# EAGLE board axiom_beta_power_board_v2.23-Min.0bcea971 (EAGLE 7.7.0), part 1 of 5
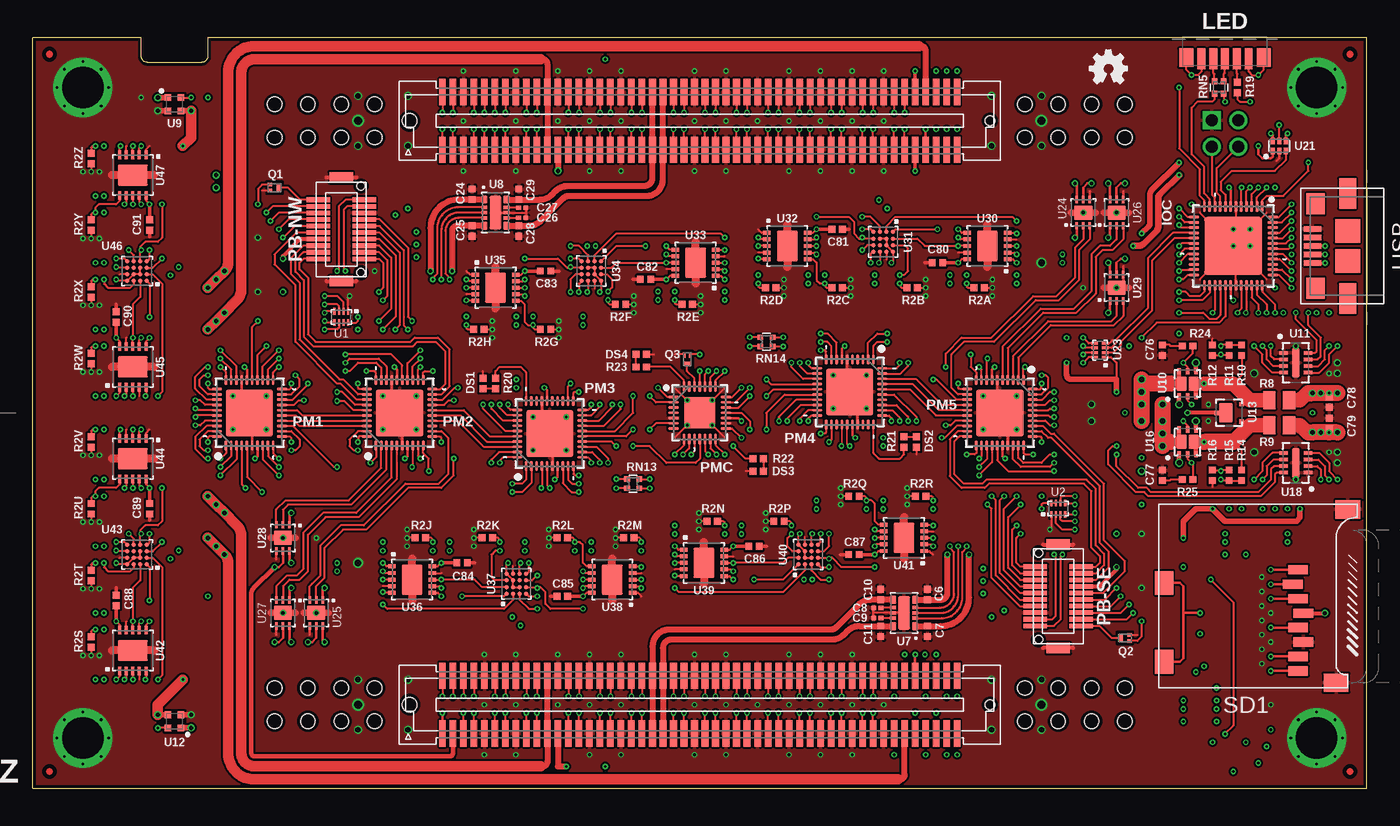
[diagram p0: board, top side]
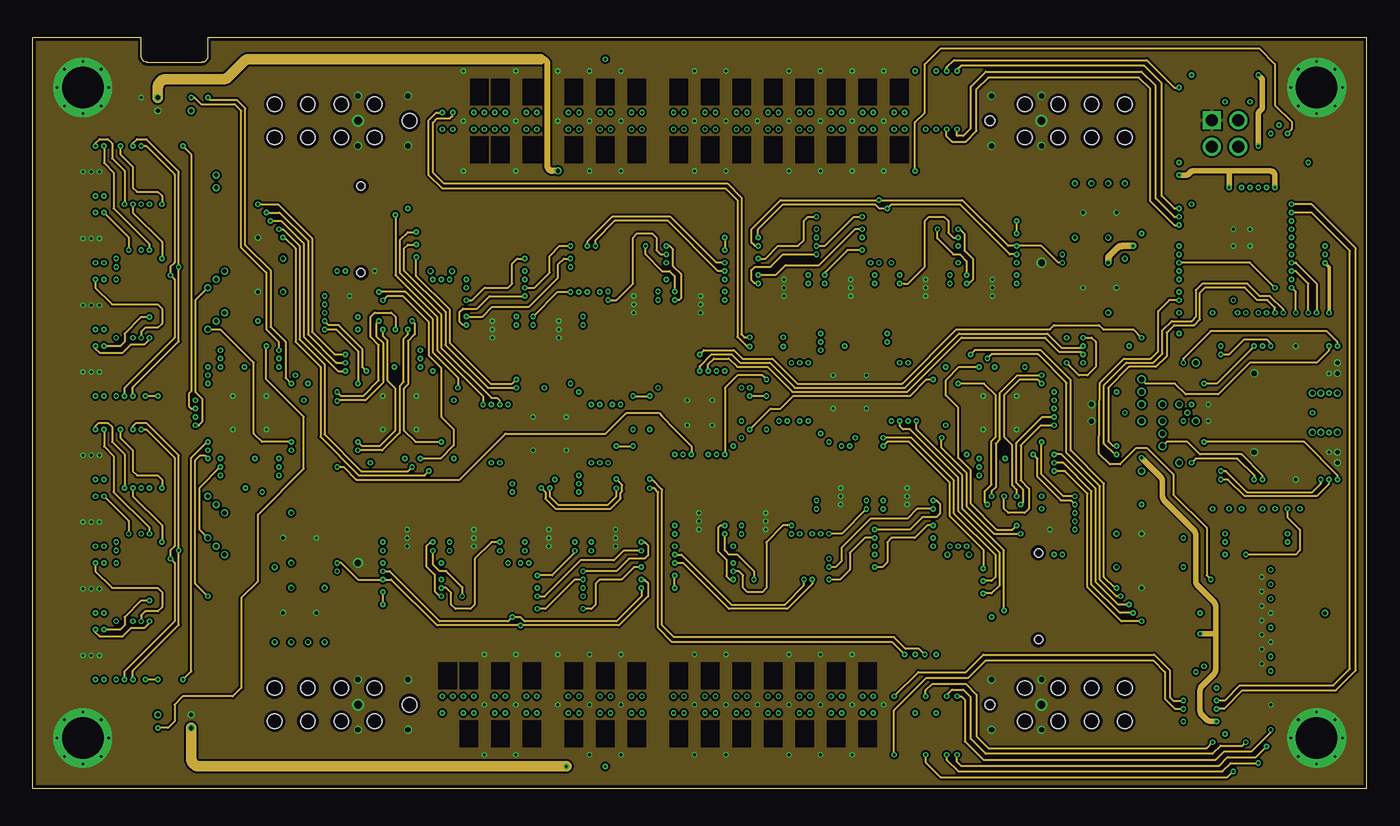
[diagram p1: board, inner layer Route2]
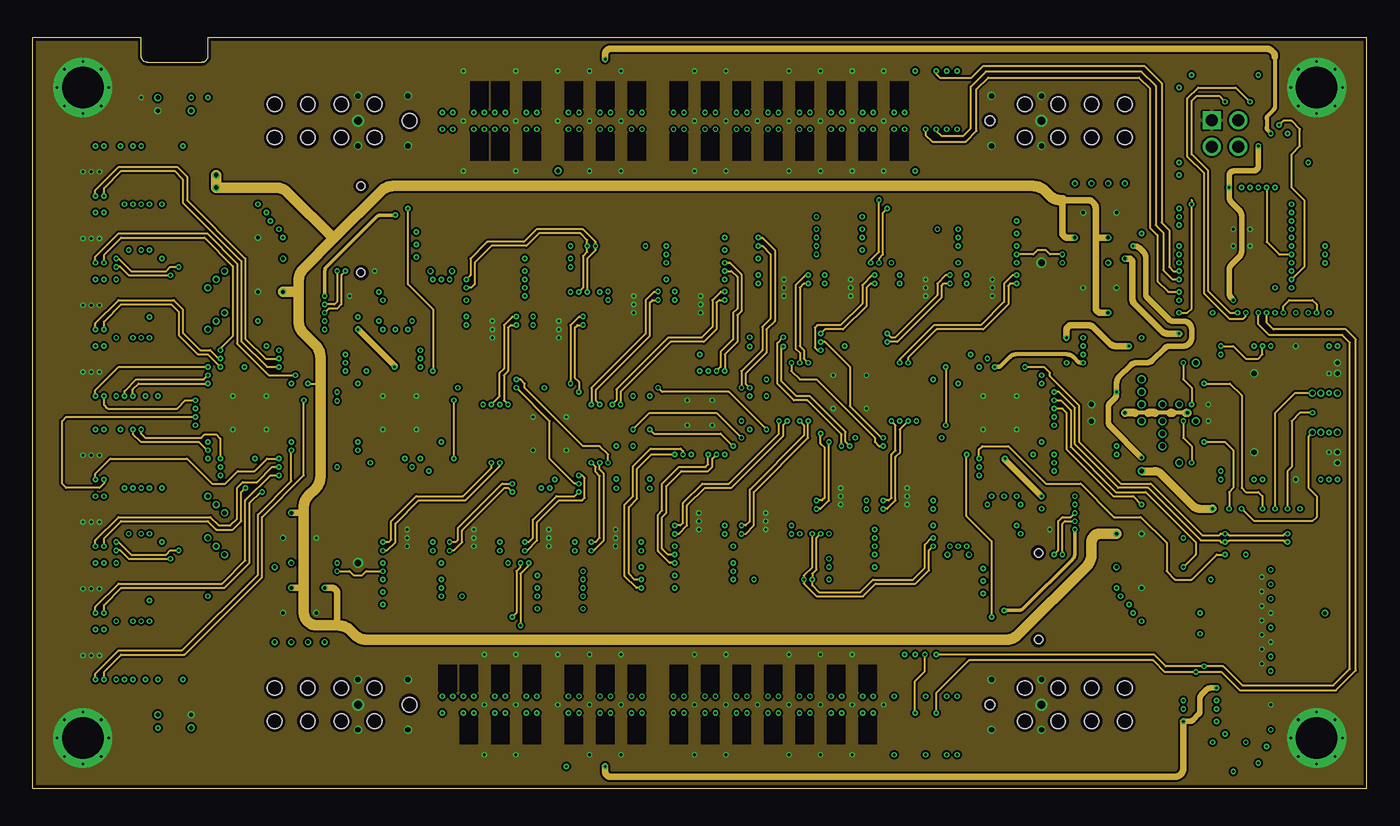
[diagram p2: board, inner layer Route15]
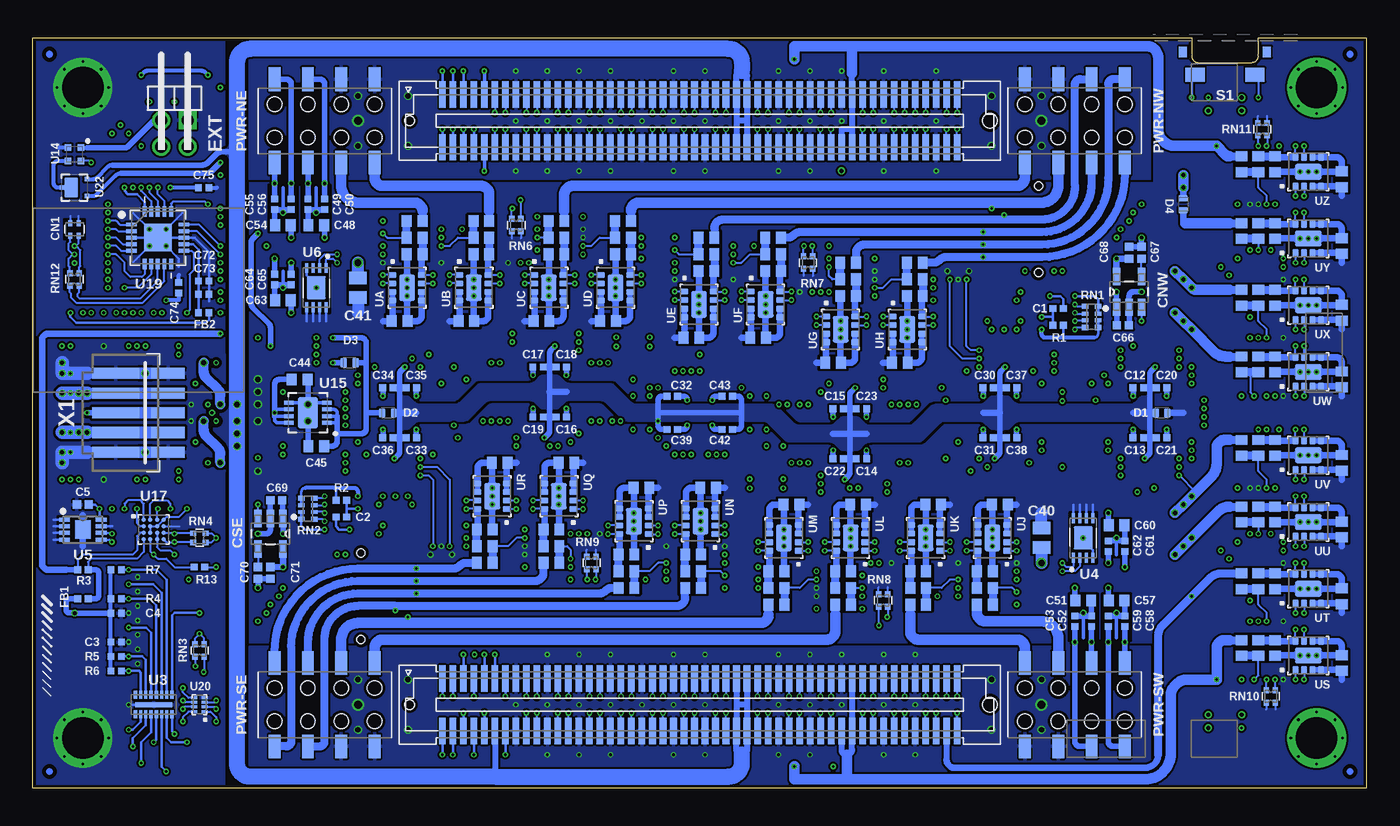
[diagram p3: board, bottom side, seen from below]

Size 101.6 x 57.15 mm. Coordinates in mm from the lower left corner, seen from the top.
Outline: 101.6,57.15 13.33,57.15 13.33,55.75 arc-90 12.83,55.25 8.76,55.25 arc-90 8.25,55.75 8.25,57.15 0,57.15 0,0 101.6,0 101.6,57.15
Copper layers (1*2*15*16): Top 0.035559375mm / dielectric 0.17018125mm / Route2 0.01778125mm / dielectric 47mil / Route15 0.01778125mm / dielectric 0.17018125mm / Bottom 0.035559375mm
Design rules "OSHPark-4layer-tuned *": minimum track width 5mil, minimum drill 8mil, track to track 6mil, track to pad 5mil, pad to pad 5mil, via to via 5mil, smd to smd 0mil, copper to edge 10mil, drill to drill 6mil, minimum pad ring 4mil, minimum via ring 4mil, stop-mask expansion 2mil, vias tented up to drill 25mil, thermal gap 6mil
Net classes: 1 LVDS: width 0.152 mm, drill 0.203 mm, clearance 0.152 mm
tKeepout: area 1.3,50.8 to 6.3,55.9; area 1.3,1.3 to 6.3,6.3; area 95.2,1.3 to 100.3,6.3; area 95.2,50.8 to 100.3,55.9
bKeepout: area 95.2,50.8 to 100.3,55.9; area 95.2,1.3 to 100.3,6.3; area 1.3,1.3 to 6.3,6.3; area 1.3,50.8 to 6.3,55.9

## Footprints (pad centres in the part's own frame; a part is rotated, then mirrored left to right if it is on the bottom)
µZ-SOCKET-NOHOLES-R = smd 0.5 x 2: 1 19.6,24.425; 2 19.6,20.027; 3 18.8,24.425; 4 18.8,20.027; 5 18,24.425; 6 18,20.027; 7 17.2,24.425; 8 17.2,20.027; 9 16.4,24.425; 10 16.4,20.027; 11 15.6,24.425; 12 15.6,20.027; 13 14.8,24.425; 14 14.8,20.027; 15 14,24.425; 16 14,20.027; 17 13.2,24.425; 18 13.2,20.027; 19 12.4,24.425; 20 12.4,20.027; 21 11.6,24.425; 22 11.6,20.027; 23 10.8,24.425; 24 10.8,20.027; 25 10,24.425; 26 10,20.027; 27 9.2,24.425; 28 9.2,20.027; 29 8.4,24.425; 30 8.4,20.027; 31 7.6,24.425; 32 7.6,20.027; 33 6.8,24.425; 34 6.8,20.027; 35 6,24.425; 36 6,20.027; 37 5.2,24.425; 38 5.2,20.027; 39 4.4,24.425; 40 4.4,20.027; 41 3.6,24.425; 42 3.6,20.027; 43 2.8,24.425; 44 2.8,20.027; 45 2,24.425; 46 2,20.027; 47 1.2,24.425; 48 1.2,20.027; 49 0.4,24.425; 50 0.4,20.027; 51 -0.4,24.425; 52 -0.4,20.027; 53 -1.2,24.425; 54 -1.2,20.027; 55 -2,24.425; 56 -2,20.027; 57 -2.8,24.425; 58 -2.8,20.027; 59 -3.6,24.425; 60 -3.6,20.027; 61 -4.4,24.425; 62 -4.4,20.027; 63 -5.2,24.425; 64 -5.2,20.027; 65 -6,24.425; 66 -6,20.027; 67 -6.8,24.425; 68 -6.8,20.027; 69 -7.6,24.425; 70 -7.6,20.027; 71 -8.4,24.425; 72 -8.4,20.027; 73 -9.2,24.425; 74 -9.2,20.027; 75 -10,24.425; 76 -10,20.027; 77 -10.8,24.425; 78 -10.8,20.027; 79 -11.6,24.425; 80 -11.6,20.027; 81 -12.4,24.425; 82 -12.4,20.027; 83 -13.2,24.425; 84 -13.2,20.027; 85 -14,24.425; 86 -14,20.027; 87 -14.8,24.425; 88 -14.8,20.027; 89 -15.6,24.425; 90 -15.6,20.027; 91 -16.4,24.425; 92 -16.4,20.027; 93 -17.2,24.425; 94 -17.2,20.027; 95 -18,24.425; 96 -18,20.027; 97 -18.8,24.425; 98 -18.8,20.027; 99 -19.6,24.425; 100 -19.6,20.027; 101 19.6,-20.025; 102 19.6,-24.425; 103 18.8,-20.027; 104 18.8,-24.425; 105 18,-20.027; 106 18,-24.425; 107 17.2,-20.027; 108 17.2,-24.425; 109 16.4,-20.027; 110 16.4,-24.425; 111 15.6,-20.027; 112 15.6,-24.425; 113 14.8,-20.027; 114 14.8,-24.425; 115 14,-20.027; 116 14,-24.425; 117 13.2,-20.027; 118 13.2,-24.425; 119 12.4,-20.027; 120 12.4,-24.425; 121 11.6,-20.027; 122 11.6,-24.425; 123 10.8,-20.027; 124 10.8,-24.425; 125 10,-20.027; 126 10,-24.425; 127 9.2,-20.027; 128 9.2,-24.425; 129 8.4,-20.027; 130 8.4,-24.425; 131 7.6,-20.027; 132 7.6,-24.425; 133 6.8,-20.027; 134 6.8,-24.425; 135 6,-20.027; 136 6,-24.425; 137 5.2,-20.027; 138 5.2,-24.425; 139 4.4,-20.027; 140 4.4,-24.425; 141 3.6,-20.027; 142 3.6,-24.425; 143 2.8,-20.027; 144 2.8,-24.425; 145 2,-20.027; 146 2,-24.425; 147 1.2,-20.027; 148 1.2,-24.425; 149 0.4,-20.027; 150 0.4,-24.425; 151 -0.4,-20.027; 152 -0.4,-24.425; 153 -1.2,-20.027; 154 -1.2,-24.425; 155 -2,-20.027; 156 -2,-24.425; 157 -2.8,-20.027; 158 -2.8,-24.425; 159 -3.6,-20.027; 160 -3.6,-24.425; 161 -4.4,-20.027; 162 -4.4,-24.425; 163 -5.2,-20.027; 164 -5.2,-24.425; 165 -6,-20.027; 166 -6,-24.425; 167 -6.8,-20.027; 168 -6.8,-24.425; 169 -7.6,-20.027; 170 -7.6,-24.425; 171 -8.4,-20.027; 172 -8.4,-24.425; 173 -9.2,-20.027; 174 -9.2,-24.425; 175 -10,-20.027; 176 -10,-24.425; 177 -10.8,-20.027; 178 -10.8,-24.425; 179 -11.6,-20.027; 180 -11.6,-24.425; 181 -12.4,-20.027; 182 -12.4,-24.425; 183 -13.2,-20.027; 184 -13.2,-24.425; 185 -14,-20.027; 186 -14,-24.425; 187 -14.8,-20.027; 188 -14.8,-24.425; 189 -15.6,-20.027; 190 -15.6,-24.425; 191 -16.4,-20.027; 192 -16.4,-24.425; 193 -17.2,-20.027; 194 -17.2,-24.425; 195 -18,-20.027; 196 -18,-24.425; 197 -18.8,-20.027; 198 -18.8,-24.425; 199 -19.6,-20.027; 200 -19.6,-24.425 | hole 0.725: 22.1,22.225; 22.1,-22.225 | hole 1.125: -22.1,22.225; -22.1,-22.225
0402-C = smd 0.52 x 0.52: 1 -0.4,0; 2 0.4,0
0603-C = smd 0.75 x 0.9: 1 -0.6,0; 2 0.6,0
0402-B = smd 0.62 x 0.62: 1 -0.45,0; 2 0.45,0
0201-C = smd 0.36 x 0.32: 1 -0.28,0; 2 0.28,0
0805-C = smd 0.95 x 1.35: 1 -0.75,0; 2 0.75,0
CC0504 = smd 0.3 x 0.45: 1 -0.32,-0.475; 2 0.32,-0.475; 3 0.32,0.475; 4 -0.32,0.475
SOT95P280X145-5N = smd 1.321 x 0.559: 1 -1.168,0.94; 2 -1.168,0; 3 -1.168,-0.94; 4 1.168,-0.94; 5 1.168,0.94
DFN1006D-2 = smd 0.5 x 0.7: A 0.45,0; C -0.45,0
2X02M/90-S = drill 0.914 square: 1 1,1 | drill 0.914: 2 1,-1; 3 -1,1; 4 -1,-1
UQFN50P600X600X100-49N-NSM = smd 0.8 x 0.2: 1 -3,2.2; 2 -3,1.8; 3 -3,1.4; 4 -3,1; 5 -3,0.6; 6 -3,0.2; 7 -3,-0.2; 8 -3,-0.6; 9 -3,-1; 10 -3,-1.4; 11 -3,-1.8; 12 -3,-2.2; 25 3,-2.2; 26 3,-1.8; 27 3,-1.4; 28 3,-1; 29 3,-0.6; 30 3,-0.2; 31 3,0.2; 32 3,0.6; 33 3,1; 34 3,1.4; 35 3,1.8; 36 3,2.2 | smd 0.2 x 0.8: 13 -2.2,-3; 14 -1.8,-3; 15 -1.4,-3; 16 -1,-3; 17 -0.6,-3; 18 -0.2,-3; 19 0.2,-3; 20 0.6,-3; 21 1,-3; 22 1.4,-3; 23 1.8,-3; 24 2.2,-3; 37 2.2,3; 38 1.8,3; 39 1.4,3; 40 1,3; 41 0.6,3; 42 0.2,3; 43 -0.2,3; 44 -0.6,3; 45 -1,3; 46 -1.4,3; 47 -1.8,3; 48 -2.2,3 | smd 4.4 x 4.4: EP 0,0
MSL0104-SL = smd 1.06 x 1.4: 1 2.95,-0.9; 7 -2.95,-0.9 | smd 0.6 x 1.6: 2 1.8,-1; 3 0.9,-1; 4 0,-1; 5 -0.9,-1; 6 -1.8,-1
DF12(XX)-20DP-0.5V = smd 1.8 x 0.35: 1 -1.75,2.25; 2 1.75,2.25; 3 -1.75,1.75; 4 1.75,1.75; 5 -1.75,1.25; 6 1.75,1.25; 7 -1.75,0.75; 8 1.75,0.75; 9 -1.75,0.25; 10 1.75,0.25; 11 -1.75,-0.25; 12 1.75,-0.25; 13 -1.75,-0.75; 14 1.75,-0.75; 15 -1.75,-1.25; 16 1.75,-1.25; 17 -1.75,-1.75; 18 1.75,-1.75; 19 -1.75,-2.25; 20 1.75,-2.25 | smd 1.8 x 0.8: M1 0,3.95; M2 0,-3.95 | hole 0.625: 1.5,-3.3; 1.5,3.3
UQFN40P500X500X100-41N-NSM = smd 0.75 x 0.2: 1 -2.48,1.8; 2 -2.48,1.4; 3 -2.48,1; 4 -2.48,0.6; 5 -2.48,0.2; 6 -2.48,-0.2; 7 -2.48,-0.6; 8 -2.48,-1; 9 -2.48,-1.4; 10 -2.48,-1.8; 21 2.48,-1.8; 22 2.48,-1.4; 23 2.48,-1; 24 2.48,-0.6; 25 2.48,-0.2; 26 2.48,0.2; 27 2.48,0.6; 28 2.48,1; 29 2.48,1.4; 30 2.48,1.8 | smd 0.2 x 0.75: 11 -1.8,-2.48; 12 -1.4,-2.48; 13 -1,-2.48; 14 -0.6,-2.48; 15 -0.2,-2.48; 16 0.2,-2.48; 17 0.6,-2.48; 18 1,-2.48; 19 1.4,-2.48; 20 1.8,-2.48; 31 1.8,2.48; 32 1.4,2.48; 33 1,2.48; 34 0.6,2.48; 35 0.2,2.48; 36 -0.2,2.48; 37 -0.6,2.48; 38 -1,2.48; 39 -1.4,2.48; 40 -1.8,2.48 | smd 3.6 x 3.6: EP 0,0
UQFN50P400X400X100-29N-NSM = smd 0.8 x 0.2: 1 -2,1.2; 2 -2,0.8; 3 -2,0.4; 4 -2,0; 5 -2,-0.4; 6 -2,-0.8; 7 -2,-1.2; 15 2,-1.2; 16 2,-0.8; 17 2,-0.4; 18 2,0; 19 2,0.4; 20 2,0.8; 21 2,1.2 | smd 0.2 x 0.8: 8 -1.2,-2; 9 -0.8,-2; 10 -0.4,-2; 11 0,-2; 12 0.4,-2; 13 0.8,-2; 14 1.2,-2; 22 1.2,2; 23 0.8,2; 24 0.4,2; 25 0,2; 26 -0.4,2; 27 -0.8,2; 28 -1.2,2 | smd 2.4 x 2.4: EP 0,0
R2X04 = smd 0.9 x 1.8: 1 -3.81,3.175; 2 -3.81,-3.175; 3 -1.27,3.175; 4 -1.27,-3.175; 5 1.27,3.175; 6 1.27,-3.175; 7 3.81,3.175; 8 3.81,-3.175 | hole 1.1: -3.81,1.27; -1.27,1.27; -1.27,-1.27; -3.81,-1.27; 1.27,1.27; 1.27,-1.27; 3.81,1.27; 3.81,-1.27
SOT883(B) = smd 0.4 x 0.25: 1 -0.35,0.225; 2 -0.35,-0.225 | smd 0.4 x 0.7: 3 0.35,0
4X0402ARV341 = smd 0.4 x 0.5: 1 -0.8,-0.5; 4 0.8,-0.5; 5 0.8,0.5; 8 -0.8,0.5 | smd 0.3 x 0.5: 2 -0.25,-0.5; 3 0.25,-0.5; 6 0.25,0.5; 7 -0.25,0.5
EXB24V = smd 0.4 x 0.45: 1 -0.35,-0.475; 2 0.35,-0.475; 3 0.35,0.475; 4 -0.35,0.475
SKSNLAE010 = smd 1.45 x 1.05: 1 -2.275,2.575; 2 2.275,2.575 | smd 0.6 x 0.8: 3 -3.2,0.85; 4 3.2,0.85
TF-MICRO-SD_PP2 = smd 0.7 x 1.5: 1 9,-10.64; 2 7.9,-10.24; 3 6.8,-10.64; 4 5.7,-11.04; 5 4.6,-10.64; 6 3.5,-11.04; 7 2.4,-10.64; 8 1.3,-10.64 | smd 1.8 x 1.4: CD1 2,-0.44; CD2 8,-0.44 | smd 1.4 x 1.9: MT1 0.4,-13.54; MT2 13.6,-14.44
UDFN-8 = smd 0.22 x 0.48: 1 -0.525,-0.43; 2 -0.175,-0.43; 3 0.175,-0.43; 4 0.525,-0.43; 5 0.525,0.43; 6 0.175,0.43; 7 -0.175,0.43; 8 -0.525,0.43
SON40P135X330X55-17N = smd 0.61 x 0.254: 1 -0.737,1.397; 2 -0.737,0.991; 3 -0.737,0.61; 4 -0.737,0.203; 5 -0.737,-0.203; 6 -0.737,-0.61; 7 -0.737,-0.991; 8 -0.737,-1.397; 9 0.737,-1.397; 10 0.737,-0.991; 11 0.737,-0.61; 12 0.737,-0.203; 13 0.737,0.203; 14 0.737,0.61; 15 0.737,0.991; 16 0.737,1.397 | smd 0.406 x 2.794: 17 0,0
DFN-8 = smd 0.3 x 0.75: 1 -0.75,-1.5; 2 -0.25,-1.5; 3 0.25,-1.5; 4 0.75,-1.5; 5 0.75,1.5; 6 0.25,1.5; 7 -0.25,1.5; 8 -0.75,1.5 | smd 1.45 x 1.75: EP 0,0
DFN200X300X100-9N = smd 0.813 x 0.305: 1 -1.397,0.762; 2 -1.397,0.254; 3 -1.397,-0.254; 4 -1.397,-0.762; 5 1.397,-0.762; 6 1.397,-0.254; 7 1.397,0.254; 8 1.397,0.762 | smd 1.194 x 1.397: EP 0,0
V-DFN3020-14 = smd 0.65 x 0.5: 1 -1,-0.85; 5 1,-0.85; 6 1,0.85; 10 -1,0.85 | smd 0.25 x 0.5: 2 -0.4,-0.85; 3 0,-0.85; 4 0.4,-0.85; 7 0.4,0.85; 8 0,0.85; 9 -0.4,0.85 | smd 2.55 x 0.9: EP 0,0
MLF-4 = smd 0.5 x 0.5: 1 -0.5,-0.5; 2 0.5,-0.5; 3 0.5,0.5; 4 -0.5,0.5
UDFN6 = smd 0.47 x 0.35: 1 -0.95,0.65; 2 -0.95,0; 3 -0.95,-0.65; 4 0.95,-0.65; 5 0.95,0; 6 0.95,0.65 | smd 1.1 x 0.75: D1 0,0.46; D2 0,-0.46
DFN8 = smd 0.25 x 0.7: 1 -0.75,-0.925; 2 -0.25,-0.925; 3 0.25,-0.925; 4 0.75,-0.925; 5 0.75,0.925; 6 0.25,0.925; 7 -0.25,0.925; 8 -0.75,0.925 | smd 2.2 x 0.6: EP 0,0
DFN2020D-3 = smd 0.45 x 0.35: 1 -0.95,0.65; 2 -0.95,-0.65; 3 0.95,0 | smd 1 x 1.5: 4 0.25,0
DFN3X3_8LEAD = smd 0.813 x 0.305: 1 -1.448,0.762; 2 -1.448,0.254; 3 -1.448,-0.254; 4 -1.448,-0.762; 5 1.448,-0.762; 6 1.448,-0.254; 7 1.448,0.254; 8 1.448,0.762 | smd 1.549 x 2.388: 9 0,0
WLCSP-16-LP = smd 0.325 x 0.325: A1 -0.75,0.75; A2 -0.25,0.75; A3 0.25,0.75; A4 0.75,0.75; B1 -0.75,0.25; B2 -0.25,0.25; B3 0.25,0.25; B4 0.75,0.25; C1 -0.75,-0.25; C2 -0.25,-0.25; C3 0.25,-0.25; C4 0.75,-0.25; D1 -0.75,-0.75; D2 -0.25,-0.75; D3 0.25,-0.75; D4 0.75,-0.75
QFN65P400X400X100-21N-NSM = smd 0.8 x 0.3: 1 -2,1; 2 -2,0.5; 3 -2,0; 4 -2,-0.5; 5 -2,-1; 11 2,-1; 12 2,-0.5; 13 2,0; 14 2,0.5; 15 2,1 | smd 0.3 x 0.8: 6 -1,-2; 7 -0.5,-2; 8 0,-2; 9 0.5,-2; 10 1,-2; 16 1,2; 17 0.5,2; 18 0,2; 19 -0.5,2; 20 -1,2 | smd 2.1 x 2.1: EP 0,0
X2SON-8 = smd 0.2 x 0.52: 1 -0.525,-0.4; 2 -0.175,-0.4; 3 0.175,-0.4; 4 0.525,-0.4; 5 0.525,0.4; 6 0.175,0.4; 7 -0.175,0.4; 8 -0.525,0.4
MICROPAK-6 = smd 0.3 x 0.5: 1 -0.5,-0.375; 2 0,-0.375; 3 0.5,-0.375; 4 0.5,0.375; 5 0,0.375; 6 -0.5,0.375
DFN2018-6 = smd 0.25 x 0.55: 1 -0.5,-1; 2 0,-1; 3 0.5,-1; 4 0.5,1; 5 0,1; 6 -0.5,1 | smd 1.4 x 1.1: 10 0,0
DFN-10 = smd 0.3 x 0.65: 1 -1,-1.55; 2 -0.5,-1.55; 3 0,-1.55; 4 0.5,-1.55; 5 1,-1.55; 6 1,1.55; 7 0.5,1.55; 8 0,1.55; 9 -0.5,1.55; 10 -1,1.55 | smd 2.3 x 1.6: EP 0,0
MICROSIP = smd 0.48 x 0.58: 1 -0.975,-1.1; 2 -0.325,-1.1; 3 0.325,-1.1; 4 0.975,-1.1; 5 0.975,1.1; 6 0.325,1.1; 7 -0.325,1.1; 8 -0.975,1.1 | smd 2 x 1.2: EP 0,0
MICRO-AB-H-SMT = smd 0.4 x 1.35: 1 -1.3,4.125; 2 -0.65,4.125; 3 0,4.125; 4 0.65,4.125; 5 1.3,4.125 | smd 2.3 x 1.3: Z1 -4,1.45; Z4 4,1.45 | smd 1.8 x 1.9: Z2 -1.15,1.45; Z3 1.15,1.45 | smd 1.6 x 1.4: Z5 -3.2,3.9; Z6 3.2,3.9
PICO-SPOX-5 = smd 0.85 x 2.55: 1 -3,-6.5; 2 -1.5,-6.5; 3 0,-6.5; 4 1.5,-6.5; 5 3,-6.5 | smd 0.85 x 3.55: 1A -3,-2.5; 2A -1.5,-2.5; 3A 0,-2.5; 4A 1.5,-2.5; 5A 3,-2.5
µZ-CONONLY = smd 0.5 x 2: 1 19.6,-24.226; 2 19.6,-20.226; 3 18.8,-24.226; 4 18.8,-20.226; 5 18,-24.226; 6 18,-20.226; 7 17.2,-24.226; 8 17.2,-20.226; 9 16.4,-24.226; 10 16.4,-20.226; 11 15.6,-24.226; 12 15.6,-20.226; 13 14.8,-24.226; 14 14.8,-20.226; 15 14,-24.226; 16 14,-20.226; 17 13.2,-24.226; 18 13.2,-20.226; 19 12.4,-24.226; 20 12.4,-20.226; 21 11.6,-24.226; 22 11.6,-20.226; 23 10.8,-24.226; 24 10.8,-20.226; 25 10,-24.226; 26 10,-20.226; 27 9.2,-24.226; 28 9.2,-20.226; 29 8.4,-24.226; 30 8.4,-20.226; 31 7.6,-24.226; 32 7.6,-20.226; 33 6.8,-24.226; 34 6.8,-20.226; 35 6,-24.226; 36 6,-20.226; 37 5.2,-24.226; 38 5.2,-20.226; 39 4.4,-24.226; 40 4.4,-20.226; 41 3.6,-24.226; 42 3.6,-20.226; 43 2.8,-24.226; 44 2.8,-20.226; 45 2,-24.226; 46 2,-20.226; 47 1.2,-24.226; 48 1.2,-20.226; 49 0.4,-24.226; 50 0.4,-20.226; 51 -0.4,-24.226; 52 -0.4,-20.226; 53 -1.2,-24.226; 54 -1.2,-20.226; 55 -2,-24.226; 56 -2,-20.226; 57 -2.8,-24.226; 58 -2.8,-20.226; 59 -3.6,-24.226; 60 -3.6,-20.226; 61 -4.4,-24.226; 62 -4.4,-20.226; 63 -5.2,-24.226; 64 -5.2,-20.226; 65 -6,-24.226; 66 -6,-20.226; 67 -6.8,-24.226; 68 -6.8,-20.226; 69 -7.6,-24.226; 70 -7.6,-20.226; 71 -8.4,-24.226; 72 -8.4,-20.226; 73 -9.2,-24.226; 74 -9.2,-20.226; 75 -10,-24.226; 76 -10,-20.226; 77 -10.8,-24.226; 78 -10.8,-20.226; 79 -11.6,-24.226; 80 -11.6,-20.226; 81 -12.4,-24.226; 82 -12.4,-20.226; 83 -13.2,-24.226; 84 -13.2,-20.226; 85 -14,-24.226; 86 -14,-20.226; 87 -14.8,-24.226; 88 -14.8,-20.226; 89 -15.6,-24.226; 90 -15.6,-20.226; 91 -16.4,-24.226; 92 -16.4,-20.226; 93 -17.2,-24.226; 94 -17.2,-20.226; 95 -18,-24.226; 96 -18,-20.226; 97 -18.8,-24.226; 98 -18.8,-20.226; 99 -19.6,-24.226; 100 -19.6,-20.226; 101 19.6,20.226; 102 19.6,24.226; 103 18.8,20.226; 104 18.8,24.226; 105 18,20.226; 106 18,24.226; 107 17.2,20.226; 108 17.2,24.226; 109 16.4,20.226; 110 16.4,24.226; 111 15.6,20.226; 112 15.6,24.226; 113 14.8,20.226; 114 14.8,24.226; 115 14,20.226; 116 14,24.226; 117 13.2,20.226; 118 13.2,24.226; 119 12.4,20.226; 120 12.4,24.226; 121 11.6,20.226; 122 11.6,24.226; 123 10.8,20.226; 124 10.8,24.226; 125 10,20.226; 126 10,24.226; 127 9.2,20.226; 128 9.2,24.226; 129 8.4,20.226; 130 8.4,24.226; 131 7.6,20.226; 132 7.6,24.226; 133 6.8,20.226; 134 6.8,24.226; 135 6,20.226; 136 6,24.226; 137 5.2,20.226; 138 5.2,24.226; 139 4.4,20.226; 140 4.4,24.226; 141 3.6,20.226; 142 3.6,24.226; 143 2.8,20.226; 144 2.8,24.226; 145 2,20.226; 146 2,24.226; 147 1.2,20.226; 148 1.2,24.226; 149 0.4,20.226; 150 0.4,24.226; 151 -0.4,20.226; 152 -0.4,24.226; 153 -1.2,20.226; 154 -1.2,24.226; 155 -2,20.226; 156 -2,24.226; 157 -2.8,20.226; 158 -2.8,24.226; 159 -3.6,20.226; 160 -3.6,24.226; 161 -4.4,20.226; 162 -4.4,24.226; 163 -5.2,20.226; 164 -5.2,24.226; 165 -6,20.226; 166 -6,24.226; 167 -6.8,20.226; 168 -6.8,24.226; 169 -7.6,20.226; 170 -7.6,24.226; 171 -8.4,20.226; 172 -8.4,24.226; 173 -9.2,20.226; 174 -9.2,24.226; 175 -10,20.226; 176 -10,24.226; 177 -10.8,20.226; 178 -10.8,24.226; 179 -11.6,20.226; 180 -11.6,24.226; 181 -12.4,20.226; 182 -12.4,24.226; 183 -13.2,20.226; 184 -13.2,24.226; 185 -14,20.226; 186 -14,24.226; 187 -14.8,20.226; 188 -14.8,24.226; 189 -15.6,20.226; 190 -15.6,24.226; 191 -16.4,20.226; 192 -16.4,24.226; 193 -17.2,20.226; 194 -17.2,24.226; 195 -18,20.226; 196 -18,24.226; 197 -18.8,20.226; 198 -18.8,24.226; 199 -19.6,20.226; 200 -19.6,24.226 | hole 1.125: -22.1,-22.225; -22.1,22.225 | hole 0.725: 22.1,-22.225; 22.1,22.225

## Placement (x,y rotation side)
BETA  µZ-FCI-SOCKET-NOHOLES-R  [µZ-SOCKET-NOHOLES-R]  50.8,28.57 0 top
C1  10n  [0402-C]  23.49,36.51 0 bottom
C1A  [0603-C]  73.66,35.56 0 bottom
C1B  [0603-C]  68.58,35.56 0 bottom
C1C  [0603-C]  62.86,35.56 0 bottom
C1D  [0603-C]  57.78,35.56 0 bottom
C1E  [0603-C]  51.43,34.29 0 bottom
C1F  [0603-C]  46.35,34.29 0 bottom
C1G  [0603-C]  40.64,32.38 0 bottom
C1H  [0603-C]  35.56,32.38 0 bottom
C1J  [0603-C]  27.94,21.59 180 bottom
C1K  [0603-C]  33.02,21.59 180 bottom
C1L  [0603-C]  38.73,21.59 180 bottom
C1M  [0603-C]  43.81,21.59 180 bottom
C1N  [0603-C]  50.16,22.86 180 bottom
C1P  [0603-C]  55.24,22.86 180 bottom
C1Q  [0603-C]  60.96,24.77 180 bottom
C1R  [0603-C]  66.04,24.77 180 bottom
C1S  [0603-C]  1.9,9.52 90 bottom
C1T  [0603-C]  1.9,14.6 90 bottom
C1U  [0603-C]  1.9,19.68 90 bottom
C1V  [0603-C]  1.9,24.77 90 bottom
C1W  [0603-C]  1.9,31.11 90 bottom
C1X  [0603-C]  1.9,36.2 90 bottom
C1Y  [0603-C]  1.9,41.27 90 bottom
C1Z  [0603-C]  1.9,46.36 90 bottom
C2  10n  [0402-C]  78.1,20.64 180 bottom
C2A  [0603-C]  72.52,40.64 180 bottom
C2B  [0603-C]  67.44,40.64 180 bottom
C2C  [0603-C]  61.72,40.64 180 bottom
C2D  [0603-C]  56.64,40.64 180 bottom
C2E  [0603-C]  50.29,39.37 180 bottom
C2F  [0603-C]  45.21,39.37 180 bottom
C2G  [0603-C]  39.5,37.47 180 bottom
C2H  [0603-C]  34.42,37.47 180 bottom
C2J  [0603-C]  29.08,16.51 0 bottom
C2K  [0603-C]  34.16,16.51 0 bottom
C2L  [0603-C]  39.88,16.51 0 bottom
C2M  [0603-C]  44.96,16.51 0 bottom
C2N  [0603-C]  51.31,17.78 0 bottom
C2P  [0603-C]  56.39,17.78 0 bottom
C2Q  [0603-C]  62.1,19.68 0 bottom
C2R  [0603-C]  67.18,19.68 0 bottom
C2S  [0603-C]  6.98,10.67 270 bottom
C2T  [0603-C]  6.98,15.75 270 bottom
C2U  [0603-C]  6.98,20.83 270 bottom
C2V  [0603-C]  6.98,25.91 270 bottom
C2W  [0603-C]  6.98,32.26 270 bottom
C2X  [0603-C]  6.98,37.34 270 bottom
C2Y  [0603-C]  6.98,42.42 270 bottom
C2Z  [0603-C]  6.98,47.5 270 bottom
C3  1u  [0402-C]  95.25,11.12 0 bottom
C4  100n  [0402-C]  95.25,13.32 0 bottom
C5  100n  [0402-B]  97.79,21.59 180 bottom
C6  [0402-C]  68.14,14.73 90 top
C7  [0402-C]  68.14,11.94 270 top
C8  [0201-C]  64.33,13.72 180 top
C9  [0201-C]  64.33,12.95 180 top
C10  [0402-C]  64.58,14.73 90 top
C11  [0402-C]  64.58,11.94 270 top
C12  100n  [0402-C]  17.4,30.48 180 bottom
C13  100n  [0402-C]  17.4,26.67 180 bottom
C14  100n  [0402-C]  38.48,25.08 0 bottom
C15  100n  [0402-C]  40.26,28.89 180 bottom
C16  100n  [0402-C]  61.34,28.26 0 bottom
C17  100n  [0402-C]  63.12,32.07 180 bottom
C18  4u7  [0402-C]  61.34,32.07 0 bottom
C19  4u7  [0402-C]  63.12,28.26 180 bottom
C20  4u7  [0402-C]  15.62,30.48 0 bottom
C21  4u7  [0402-C]  15.62,26.67 0 bottom
C22  4u7  [0402-C]  40.26,25.08 180 bottom
C23  4u7  [0402-C]  38.48,28.89 0 bottom
C24  [0402-C]  33.46,45.21 90 top
C25  [0402-C]  33.46,42.42 270 top
C26  [0201-C]  37.27,43.43 0 top
C27  [0201-C]  37.27,44.2 0 top
C28  [0402-C]  37.02,42.42 270 top
C29  [0402-C]  37.02,45.21 90 top
C30  100n  [0402-C]  28.83,30.48 180 bottom
C31  100n  [0402-C]  28.83,26.67 180 bottom
C32  100n  [0402-C]  52.9,29.84 0 bottom
C33  100n  [0402-C]  72.77,26.67 0 bottom
C34  100n  [0402-C]  74.55,30.48 180 bottom
C35  4u7  [0402-C]  72.77,30.48 0 bottom
C36  4u7  [0402-C]  74.55,26.67 180 bottom
C37  4u7  [0402-C]  27.05,30.48 0 bottom
C38  4u7  [0402-C]  27.05,26.67 0 bottom
C39  4u7  [0402-C]  52.9,27.3 0 bottom
C40  47u  [0805-C]  24.76,19.05 270 bottom
C41  47u  [0805-C]  76.83,38.1 90 bottom
C42  10u  [0402-C]  48.7,27.3 180 bottom
C43  10u  [0402-C]  48.7,29.84 180 bottom
C44  10u  [0603-C]  81.28,31.11 0 bottom
C45  10u  [0603-C]  80.01,26.04 180 bottom
C48  4u7  [0603-C]  80.01,42.86 180 bottom
C49  1u  [0402-C]  80.64,44.45 270 bottom
C50  1u  [0402-C]  79.38,44.45 270 bottom
C51  4u7  [0603-C]  21.59,14.29 0 bottom
C52  1u  [0402-C]  20.95,12.7 90 bottom
C53  1u  [0402-C]  22.22,12.7 90 bottom
C54  4u7  [0603-C]  82.55,42.86 180 bottom
C55  1u  [0402-C]  83.19,44.45 270 bottom
C56  1u  [0402-C]  81.91,44.45 270 bottom
C57  4u7  [0603-C]  19.05,14.29 0 bottom
C58  1u  [0402-C]  18.41,12.7 90 bottom
C59  1u  [0402-C]  19.68,12.7 90 bottom
C60  4u7  [0603-C]  19.05,20 0 bottom
C61  1u  [0402-C]  18.41,18.41 90 bottom
C62  1u  [0402-C]  19.68,18.41 90 bottom
C63  4u7  [0603-C]  82.55,37.15 180 bottom
C64  1u  [0402-C]  83.19,38.73 270 bottom
C65  1u  [0402-C]  81.91,38.73 270 bottom
C66  1u  [0402-B]  18.57,35.24 0 bottom
C67  10n  [0402-B]  17.14,40.77 90 bottom
C68  1u  [0402-B]  18.1,40.77 90 bottom
C69  1u  [0402-B]  83.06,21.91 180 bottom
C70  10n  [0402-B]  84.45,16.38 270 bottom
C71  1u  [0402-B]  83.5,16.38 270 bottom
C72  4u7  [0402-C]  88.58,38.61 0 bottom
C73  100n  [0402-C]  88.58,37.59 0 bottom
C74  4u7  [0402-C]  90.49,38.1 90 bottom
C75  100n  [0402-C]  88.58,45.72 0 bottom
C76  10n  [0402-C]  86.04,33.34 270 top
C77  10n  [0402-C]  86.04,23.81 90 top
C78  10n  [0402-C]  98.74,29.4 270 top
C79  10n  [0402-C]  98.74,27.75 90 top
C80  [0402-C]  68.9,40 180 top
C81  [0402-C]  61.28,42.55 0 top
C82  [0402-C]  46.67,38.73 180 top
C83  [0402-C]  39.05,39.37 0 top
C84  [0402-C]  32.7,17.14 0 top
C85  [0402-C]  40.32,14.6 180 top
C86  [0402-C]  54.93,18.41 0 top
C87  [0402-C]  62.55,17.78 180 top
C88  [0402-C]  6.35,14.29 90 top
C89  [0402-C]  8.89,21.27 270 top
C90  [0402-C]  6.35,35.88 90 top
C91  [0402-C]  8.89,42.86 270 top
CN1  [CC0504]  98.42,42.55 180 bottom
CNW  SPX3819M5-L  [SOT95P280X145-5N]  18.1,37.78 90 bottom
CSE  SPX3819M5-L  [SOT95P280X145-5N]  83.5,19.37 270 bottom
D1  PMEG2010BELD  [DFN1006D-2]  15.62,28.57 0 bottom
D2  PMEG2010BELD  [DFN1006D-2]  74.55,28.57 180 bottom
D3  PMEG2010BELD  [DFN1006D-2]  77.47,32.38 0 bottom
D4  PMEG2010BELD  [DFN1006D-2]  13.97,44.45 270 bottom
DS1  [0402-C]  34.29,30.8 90 top
DS2  [0402-C]  67.31,26.35 270 top
DS3  [0402-C]  55.24,24.13 180 top
DS4  [0402-C]  46.35,33.02 0 top
EXT  [2X02M/90-S]  90.81,49.85 0 bottom
F1  FIDUCIAL  [FID_ARROW]  1.27,55.88 0 top
F2  FIDUCIAL  [FID_ARROW]  100.33,55.88 0 bottom
F3  FIDUCIAL  [FID_ARROW]  100.33,55.88 0 top
F4  FIDUCIAL  [FID_ARROW]  1.27,55.88 0 bottom
F5  FIDUCIAL  [FID_ARROW]  100.33,1.27 0 top
F6  FIDUCIAL  [FID_ARROW]  1.27,1.27 0 bottom
F7  FIDUCIAL  [FID_ARROW]  1.27,1.27 0 top
F8  FIDUCIAL  [FID_ARROW]  100.33,1.27 0 bottom
FB1  [0402-C]  97.79,14.42 180 bottom
FB2  [0402-C]  88.58,36.2 0 bottom
FBA  [0603-C]  72.52,43.18 0 bottom
FBB  [0603-C]  67.44,43.18 0 bottom
FBC  [0603-C]  61.72,43.18 0 bottom
FBD  [0603-C]  56.64,43.18 0 bottom
FBE  [0603-C]  50.29,41.91 0 bottom
FBF  [0603-C]  45.21,41.91 0 bottom
FBG  [0603-C]  39.5,40 0 bottom
FBH  [0603-C]  34.42,40 0 bottom
FBJ  [0603-C]  29.08,13.97 180 bottom
FBK  [0603-C]  34.16,13.97 180 bottom
FBL  [0603-C]  39.88,13.97 180 bottom
FBM  [0603-C]  44.96,13.97 180 bottom
FBN  [0603-C]  51.31,15.24 180 bottom
FBP  [0603-C]  56.39,15.24 180 bottom
FBQ  [0603-C]  62.1,17.14 180 bottom
FBR  [0603-C]  67.18,17.14 180 bottom
FBS  [0603-C]  9.52,10.67 90 bottom
FBT  [0603-C]  9.52,15.75 90 bottom
FBU  [0603-C]  9.52,20.83 90 bottom
FBV  [0603-C]  9.52,25.91 90 bottom
FBW  [0603-C]  9.52,32.26 90 bottom
FBX  [0603-C]  9.52,37.34 90 bottom
FBY  [0603-C]  9.52,42.42 90 bottom
FBZ  [0603-C]  9.52,47.5 90 bottom
IOC  PIC16F15386  [UQFN50P600X600X100-49N-NSM]  91.44,41.27 270 top
LED  MSL0104RGB  [MSL0104-SL]  90.81,56.52 0 top
LOGO1  OSHW_LOGO_FILLX0100-NT  [OSHW_FILLX100_NOTEXT]  80.52,53.66 0 top
PB-NW  DF12(XX)-20DP-0.5V  [DF12(XX)-20DP-0.5V]  23.49,42.55 0 top
PB-SE  DF12(XX)-20DP-0.5V  [DF12(XX)-20DP-0.5V]  78.1,14.6 180 top
PM1  PIC16F1779-NSM  [UQFN40P500X500X100-41N-NSM]  16.51,28.57 90 top
PM2  PIC16F1779-NSM  [UQFN40P500X500X100-41N-NSM]  27.94,28.57 90 top
PM3  PIC16F1779-NSM  [UQFN40P500X500X100-41N-NSM]  39.37,26.99 90 top
PM4  PIC16F1779-NSM  [UQFN40P500X500X100-41N-NSM]  62.23,30.16 270 top
PM5  PIC16F1779-NSM  [UQFN40P500X500X100-41N-NSM]  73.66,28.57 270 top
PMC  PIC16F15356  [UQFN50P400X400X100-29N-NSM]  50.8,28.57 0 top
PWR-NE  PINRC-2X04  [R2X04]  79.38,50.8 180 bottom  (not fitted)
PWR-NW  PINRC-2X04  [R2X04]  22.22,50.8 0 bottom  (not fitted)
PWR-SE  PINRC-2X04  [R2X04]  79.38,6.35 180 bottom  (not fitted)
PWR-SW  PINRC-2X04  [R2X04]  22.22,6.35 0 bottom  (not fitted)
Q1  NX3008NBKMB  [SOT883(B)]  18.41,45.72 0 top
Q2  NX3008NBKMB  [SOT883(B)]  83.19,11.43 180 top
Q3  NX3008NBKMB  [SOT883(B)]  49.85,32.64 270 top
R1  200k  [0402-C]  23.49,35.24 180 bottom
R1A  [0603-C]  72.52,41.91 180 bottom
R1B  [0603-C]  67.44,41.91 180 bottom
R1C  [0603-C]  61.72,41.91 180 bottom
R1D  [0603-C]  56.64,41.91 180 bottom
R1E  [0603-C]  50.29,40.64 180 bottom
R1F  [0603-C]  45.21,40.64 180 bottom
R1G  [0603-C]  39.5,38.73 180 bottom
R1H  [0603-C]  34.42,38.73 180 bottom
R1J  [0603-C]  29.08,15.24 0 bottom
R1K  [0603-C]  34.16,15.24 0 bottom
R1L  [0603-C]  39.88,15.24 0 bottom
R1M  [0603-C]  44.96,15.24 0 bottom
R1N  [0603-C]  51.31,16.51 0 bottom
R1P  [0603-C]  56.39,16.51 0 bottom
R1Q  [0603-C]  62.1,18.41 0 bottom
R1R  [0603-C]  67.18,18.41 0 bottom
R1S  [0603-C]  8.25,10.67 270 bottom
R1T  [0603-C]  8.25,15.75 270 bottom
R1U  [0603-C]  8.25,20.83 270 bottom
R1V  [0603-C]  8.25,25.91 270 bottom
R1W  [0603-C]  8.25,32.26 270 bottom
R1X  [0603-C]  8.25,37.34 270 bottom
R1Y  [0603-C]  8.25,42.42 270 bottom
R1Z  [0603-C]  8.25,47.5 270 bottom
R2  200k  [0402-C]  78.1,21.91 0 bottom
R2A  [0402-C]  72.07,38.1 180 top
R2B  [0402-C]  66.99,38.1 180 top
R2C  [0402-C]  61.28,38.1 180 top
R2D  [0402-C]  56.2,38.1 180 top
R2E  [0402-C]  49.85,36.83 180 top
R2F  [0402-C]  44.77,36.83 180 top
R2G  [0402-C]  39.05,34.92 180 top
R2H  [0402-C]  33.97,34.92 180 top
R2J  [0402-C]  29.53,19.05 0 top
R2K  [0402-C]  34.61,19.05 0 top
R2L  [0402-C]  40.32,19.05 0 top
R2M  [0402-C]  45.4,19.05 0 top
R2N  [0402-C]  51.75,20.32 0 top
R2P  [0402-C]  56.83,20.32 0 top
R2Q  [0402-C]  62.55,22.23 0 top
R2R  [0402-C]  67.63,22.23 0 top
R2S  [0402-C]  4.45,11.11 90 top
R2T  [0402-C]  4.45,16.19 90 top
R2U  [0402-C]  4.45,21.27 90 top
R2V  [0402-C]  4.45,26.35 90 top
R2W  [0402-C]  4.45,32.7 90 top
R2X  [0402-C]  4.45,37.78 90 top
R2Y  [0402-C]  4.45,42.86 90 top
R2Z  [0402-C]  4.45,47.94 90 top
R3  [0402-C]  97.79,16.62 0 bottom
R4  50k  [0402-C]  95.25,14.42 0 bottom  (not fitted)
R5  50k  [0402-C]  95.25,10.02 0 bottom  (not fitted)
R6  50k  [0402-C]  95.25,8.92 0 bottom  (not fitted)
R7  50k  [0402-C]  95.25,16.62 0 bottom  (not fitted)
R8  [0805-C]  94.93,29.53 180 top
R9  [0805-C]  94.93,27.62 180 top
R10  243k  [0402-C]  92.07,33.34 90 top
R11  5k11  [0402-C]  91.12,33.34 270 top
R12  24k9  [0402-C]  89.85,33.34 90 top
R13  [0402-C]  88.9,16.83 180 bottom
R14  243k  [0402-C]  92.07,23.81 270 top
R15  5k11  [0402-C]  91.12,23.81 90 top
R16  24k9  [0402-C]  89.85,23.81 270 top
R19  [0402-C]  91.76,53.34 270 top
R20  [0402-C]  35.24,30.8 270 top
R21  [0402-C]  66.36,26.35 90 top
R22  [0402-C]  55.24,25.08 0 top
R23  [0402-C]  46.35,32.07 180 top
R24  5k11  [0402-C]  87.95,33.66 180 top
R25  5k11  [0402-C]  87.95,23.49 180 top
RN1  [4X0402ARV341]  20.95,35.88 270 bottom
RN2  [4X0402ARV341]  80.64,21.27 90 bottom
RN3  [EXB24V]  88.9,10.48 0 bottom
RN4  [EXB24V]  88.9,19.05 270 bottom
RN5  [EXB24V]  90.35,53.34 180 top
RN6  [EXB24V]  64.77,42.86 180 bottom
RN7  [EXB24V]  42.54,40 180 bottom
RN8  [EXB24V]  36.83,14.29 0 bottom
RN9  [EXB24V]  59.05,17.14 0 bottom
RN10  [EXB24V]  7.3,6.98 180 bottom
RN11  [EXB24V]  7.94,50.16 0 bottom
RN12  [EXB24V]  98.42,38.73 180 bottom
RN13  [EXB24V]  45.72,23.18 90 top
RN14  [EXB24V]  55.88,33.97 270 top
S1  SKSNLAE010  [SKSNLAE010]  10.79,56.9 180 bottom
SD1  MICRO-SD-2CD  [TF-MICRO-SD_PP2]  85.72,7.62 90 top
U1  PCA9306  [UDFN-8]  23.49,35.88 180 top
U2  PCA9306  [UDFN-8]  78.1,21.27 0 top
U3  IP4251CZ16-8-TTL  [SON40P135X330X55-17N]  92.39,6.35 270 bottom
U4  MCP9808  [DFN-8]  21.59,19.05 0 bottom
U5  BR24G04NUX  [DFN200X300X100-9N]  97.79,19.68 0 bottom
U6  MCP9808  [DFN-8]  80.01,38.1 180 bottom
U7  AP22966  [V-DFN3020-14]  66.36,13.33 90 top
U8  AP22966  [V-DFN3020-14]  35.24,43.81 270 top
U9  MIC94040  [MLF-4]  10.79,52.07 270 top
U10  NTLUD4C26N  [UDFN6]  87.95,30.8 90 top
U11  LTC4365  [DFN8]  96.2,32.38 270 top
U12  MIC94040  [MLF-4]  10.79,5.08 90 top
U13  PMEG2020CPAS  [DFN2020D-3]  91.12,28.57 180 top
U14  MIC94040  [MLF-4]  98.42,48.26 180 bottom
U15  LT1965  [DFN3X3_8LEAD]  80.64,28.57 180 bottom
U16  NTLUD4C26N  [UDFN6]  87.95,26.35 90 top
U17  PAC1934-LP  [WLCSP-16-LP]  92.39,19.68 0 bottom
U18  LTC4365  [DFN8]  96.2,24.77 90 top
U19  FT231-NSM  [QFN65P400X400X100-21N-NSM]  92.07,41.91 0 bottom
U20  TXS0102  [X2SON-8]  88.9,6.35 90 bottom
U21  FXLH1T45  [MICROPAK-6]  94.93,48.89 0 top
U22  PMEG2020CPAS  [DFN2020D-3]  98.42,45.72 180 bottom
U23  TXS0102  [X2SON-8]  81.28,33.34 90 top
U24  AP7312-3333FM-7  [DFN2018-6]  80.01,43.81 0 top
U25  AP7312-3333FM-7  [DFN2018-6]  21.59,13.33 180 top
U26  AP7312-3333FM-7  [DFN2018-6]  82.55,43.81 0 top
U27  AP7312-3333FM-7  [DFN2018-6]  19.05,13.33 180 top
U28  AP7312-3333FM-7  [DFN2018-6]  19.05,19.05 180 top
U29  AP7312-3333FM-7  [DFN2018-6]  82.55,38.1 0 top
U30  MCP46X2  [DFN-10]  72.71,41.27 90 top
U31  PAC1934-LP  [WLCSP-16-LP]  64.77,41.59 270 top
U32  MCP46X2  [DFN-10]  57.47,41.27 270 top
U33  MCP46X2  [DFN-10]  50.48,40 90 top
U34  PAC1934-LP  [WLCSP-16-LP]  42.54,39.37 270 top
U35  MCP46X2  [DFN-10]  35.24,38.1 270 top
U36  MCP46X2  [DFN-10]  28.89,15.88 270 top
U37  PAC1934-LP  [WLCSP-16-LP]  36.83,15.56 90 top
U38  MCP46X2  [DFN-10]  44.13,15.88 90 top
U39  MCP46X2  [DFN-10]  51.12,17.14 270 top
U40  PAC1934-LP  [WLCSP-16-LP]  59.05,17.78 90 top
U41  MCP46X2  [DFN-10]  66.36,19.05 90 top
U42  MCP46X2  [DFN-10]  7.62,10.48 0 top
U43  PAC1934-LP  [WLCSP-16-LP]  7.94,17.78 180 top
U44  MCP46X2  [DFN-10]  7.62,25.08 180 top
U45  MCP46X2  [DFN-10]  7.62,32.07 0 top
U46  PAC1934-LP  [WLCSP-16-LP]  7.94,39.37 180 top
U47  MCP46X2  [DFN-10]  7.62,46.67 180 top
UA  TPS82085  [MICROSIP]  73.09,38.1 270 bottom
UB  TPS82085  [MICROSIP]  68.01,38.1 270 bottom
UC  TPS82085  [MICROSIP]  62.29,38.1 270 bottom
UD  TPS82085  [MICROSIP]  57.21,38.1 270 bottom
UE  TPS82085  [MICROSIP]  50.86,36.83 270 bottom
UF  TPS82085  [MICROSIP]  45.78,36.83 270 bottom
UG  TPS82085  [MICROSIP]  40.07,34.92 270 bottom
UH  TPS82085  [MICROSIP]  34.99,34.92 270 bottom
UJ  TPS82085  [MICROSIP]  28.51,19.05 90 bottom
UK  TPS82085  [MICROSIP]  33.59,19.05 90 bottom
UL  TPS82085  [MICROSIP]  39.31,19.05 90 bottom
UM  TPS82085  [MICROSIP]  44.39,19.05 90 bottom
UN  TPS82085  [MICROSIP]  50.74,20.32 90 bottom
UP  TPS82085  [MICROSIP]  55.82,20.32 90 bottom
UQ  TPS82085  [MICROSIP]  61.53,22.23 90 bottom
UR  TPS82085  [MICROSIP]  66.61,22.23 90 bottom
US  TPS82085  [MICROSIP]  4.45,10.1 0 bottom
USB  5_USB_3S  [MICRO-AB-H-SMT]  101.6,41.27 90 top
UT  TPS82085  [MICROSIP]  4.45,15.18 0 bottom
UU  TPS82085  [MICROSIP]  4.45,20.26 0 bottom
UV  TPS82085  [MICROSIP]  4.45,25.34 0 bottom
UW  TPS82085  [MICROSIP]  4.45,31.69 0 bottom
UX  TPS82085  [MICROSIP]  4.45,36.77 0 bottom
UY  TPS82085  [MICROSIP]  4.45,41.85 0 bottom
UZ  TPS82085  [MICROSIP]  4.45,46.93 0 bottom
X1  PICO-SPOX-5  [PICO-SPOX-5]  97.79,28.57 90 bottom
ZED  µZ-FCI-CONONLY  [µZ-CONONLY]  50.8,28.57 180 bottom

## Library data of the parts
BETA ZED = microzed
C1 C1A C1B C1C C1D C1E C1F C1G C1H C1J C1K C1L C1M C1N C1P C1Q C1R C1S C1T C1U C1V C1W C1X C1Y C1Z C2 C2A C2B C2C C2D C2E C2F C2G C2H C2J C2K C2L C2M C2N C2P C2Q C2R C2S C2T C2U C2V C2W C2X C2Y C2Z C3-C45 C48-C91 DS1-DS4 FB1 FB2 FBA FBB FBC FBD FBE FBF FBG FBH FBJ FBK FBL FBM FBN FBP FBQ FBR FBS FBT FBU FBV FBW FBX FBY FBZ R1 R1A R1B R1C R1D R1E R1F R1G R1H R1J R1K R1L R1M R1N R1P R1Q R1R R1S R1T R1U R1V R1W R1X R1Y R1Z R2 R2A R2B R2C R2D R2E R2F R2G R2H R2J R2K R2L R2M R2N R2P R2Q R2R R2S R2T R2U R2V R2W R2X R2Y R2Z R3-R16 R19-R25 = generic-rcl
CN1 = array
CNW CSE = spx3819; MPN: SPX3819M5-L; OC_FARNELL: 1831948; OC_NEWARK: 23R9689; PACKAGE: SOT-23-5; SUPPLIER: EXAR
D1-D4 = pmeg2010beld
EXT = pinhead-2
F1-F8 = fiducial
IOC PMC = pic16f15386
LED = led
LOGO1 = ohw-logo
PB-NW PB-SE = df12
PM1-PM5 = pic16f1779
PWR-NE PWR-NW PWR-SE PWR-SW = pincon
Q1-Q3 = transistor
RN1 RN2 = resistor-dil; OC_FARNELL: unknown; OC_NEWARK: unknown
RN3-RN14 = array; OC_FARNELL: unknown; OC_NEWARK: unknown
S1 = switch
SD1 = micro-sd
U1 U2 = gtl2002
U3 = emifil; MPN: IP4251CZ16-8-TTL; OC_FARNELL: 1972684; OC_NEWARK: 58T9585; PACKAGE: SON-16; SUPPLIER: NXP
U4 U6 = lm75
U5 = eeprom
U7 U8 = AP22966
U9 U12 U14 = load_switch
U10 U16 = ntlud4c26n
U11 U18 = ltc4365
U13 U22 = pmeg2020cpas
U15 = lt1965
U17 U31 U34 U37 U40 U43 U46 = pac1934
U19 = ft23x
U20 U21 U23 = lvltrans
U24-U29 = ldo
U30 U32 U33 U35 U36 U38 U39 U41 U42 U44 U45 U47 = digipot
UA UB UC UD UE UF UG UH UJ UK UL UM UN UP UQ UR US UT UU UV UW UX UY UZ = TPS82085
USB = usb; TE: 1981584
X1 = pico-spox